# EAGLE board M139X (EAGLE 6.6.0)
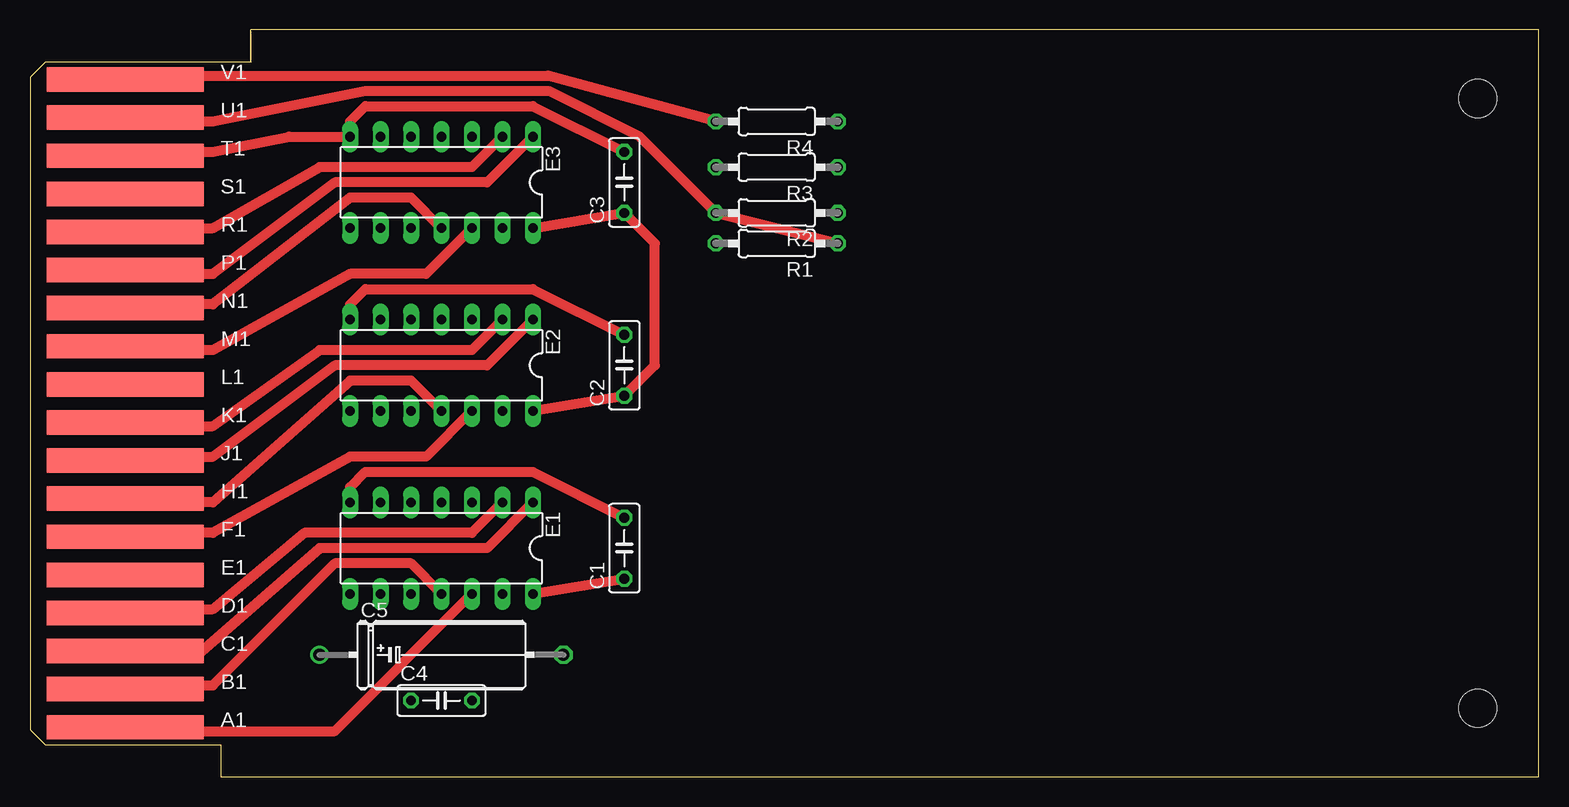
[diagram p0: board, top side]
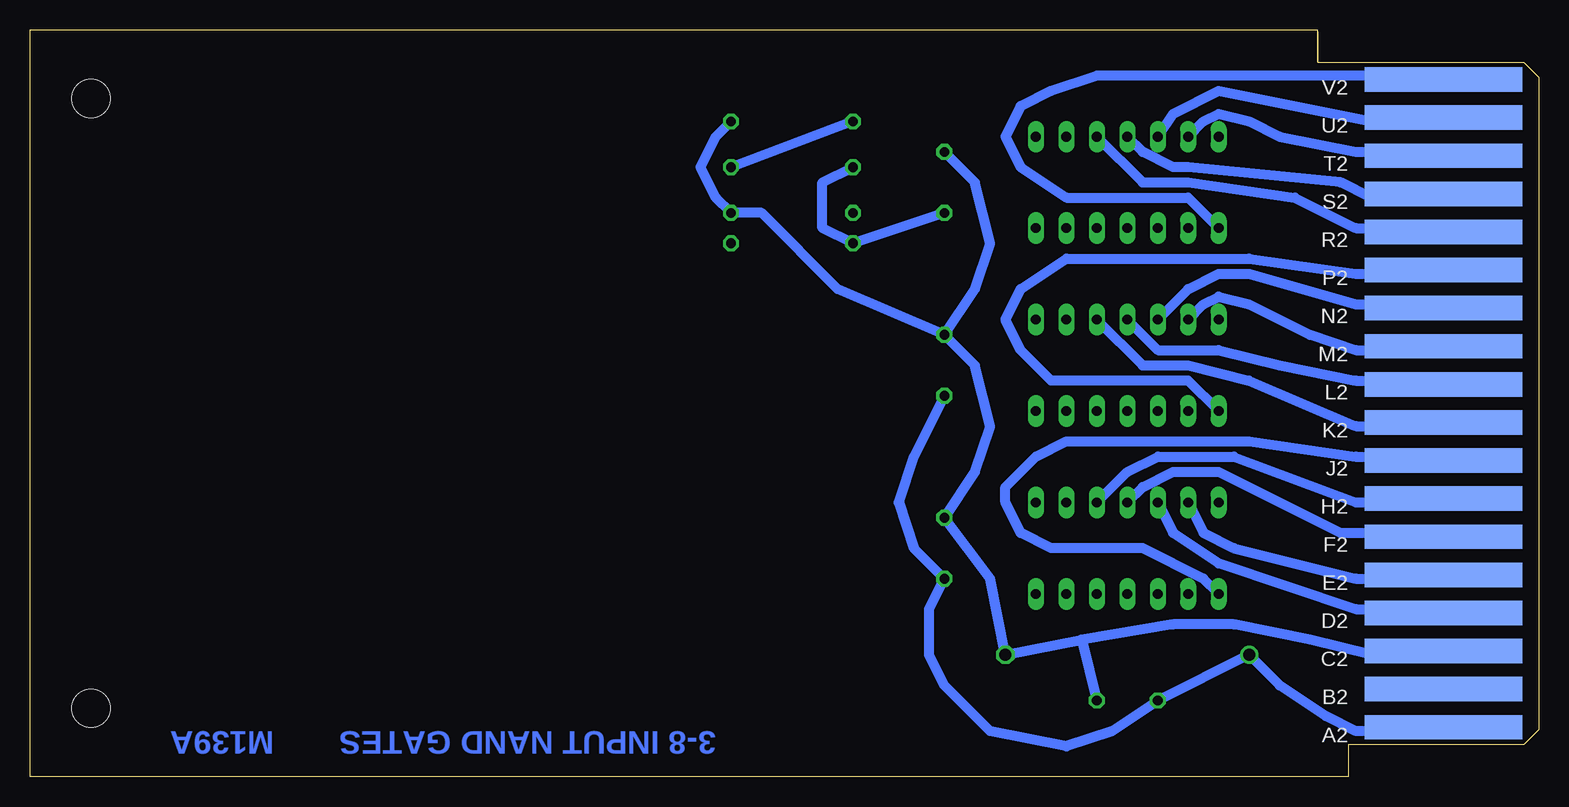
[diagram p1: board, bottom side, seen from below]

Size 125.73 x 62.23 mm. Coordinates in mm from the lower left corner, seen from the top.
Copper layers (1+16): Top 0.035mm / dielectric 1.5mm / Bottom 0.035mm
Design rules "16mils": minimum track width 16mil, minimum drill 32mil, track to track 15mil, track to pad 10mil, pad to pad 10mil, via to via 10mil, smd to smd 10mil, copper to edge 13mil, drill to drill 10mil, minimum pad ring 10mil, minimum via ring 8mil, stop-mask expansion 0mil, vias tented up to drill 0mil, thermal gap 10mil
Net classes: 0 default: width 0.813 mm

## Footprints (pad centres in the part's own frame; a part is rotated, then mirrored left to right if it is on the bottom)
C050-025X075 = drill 0.813 octagon: 1 -2.54,0; 2 2.54,0
E12-8 = drill 1.016: + -10.16,0 | drill 1.016 octagon: - 10.16,0
DIL14 = drill 0.813 long: 1 -7.62,-3.81; 2 -5.08,-3.81; 3 -2.54,-3.81; 4 0,-3.81; 5 2.54,-3.81; 6 5.08,-3.81; 7 7.62,-3.81; 8 7.62,3.81; 9 5.08,3.81; 10 2.54,3.81; 11 0,3.81; 12 -2.54,3.81; 13 -5.08,3.81; 14 -7.62,3.81
0207/10 = drill 0.813 octagon: 1 -5.08,0; 2 5.08,0
SINGLE = hole 3.175: 120.65,56.515; 120.65,5.715
EDGE-CON2 = smd 13.106 x 2.032: A1 7.938,4.128; B1 7.938,7.303; C1 7.938,10.477; D1 7.938,13.652; E1 7.938,16.828; F1 7.938,20.003; H1 7.938,23.177; J1 7.938,26.352; K1 7.938,29.527; L1 7.938,32.703; M1 7.938,35.877; N1 7.938,39.053; P1 7.938,42.227; R1 7.938,45.403; S1 7.938,48.578; T1 7.938,51.752; U1 7.938,54.928; V1 7.938,58.102 | smd 13.106 x 2.032 bottom: A2 7.938,4.128; B2 7.938,7.303; C2 7.938,10.477; D2 7.938,13.652; E2 7.938,16.828; F2 7.938,20.003; H2 7.938,23.177; J2 7.938,26.352; K2 7.938,29.527; L2 7.938,32.703; M2 7.938,35.877; N2 7.938,39.053; P2 7.938,42.227; R2 7.938,45.403; S2 7.938,48.578; T2 7.938,51.752; U2 7.938,54.928; V2 7.938,58.102

## Placement (x,y rotation side)
C1  .01uF  [C050-025X075]  49.53,19.05 90 top
C2  .01uF  [C050-025X075]  49.53,34.29 90 top
C3  .01uF  [C050-025X075]  49.53,49.53 90 top
C4  .01uF  [C050-025X075]  34.29,6.35 0 top
C5  6.8uF  [E12-8]  34.29,10.16 0 top
E1  74H30N  [DIL14]  34.29,19.05 180 top
E2  74H30N  [DIL14]  34.29,34.29 180 top
E3  74H30N  [DIL14]  34.29,49.53 180 top
R1  330  [0207/10]  62.23,44.45 180 top
R2  750  [0207/10]  62.23,46.99 180 top
R3  330  [0207/10]  62.23,50.8 180 top
R4  750  [0207/10]  62.23,54.61 180 top
U$1  OUTLINE-SINGLE  [SINGLE]  0,0 0 top
U$2  [EDGE-CON2]  0,0 0 top

## Library data of the parts
C1-C4 R1-R4 = rcl
C5 E1-E3 U$1 U$2 = dec-con

## Nets
GND: C1.2 C2.2 C3.2 C4.2 C5.- E1.7 E2.7 E3.7 R2.1 R4.1 U$2.C2 U$2.T1
N$1: E1.1 U$2.C1
N$2: E1.2 U$2.D1
N$3: E1.3 U$2.H2
N$4: E1.4 U$2.F2
N$5: E1.6 U$2.E2
N$6: E1.5 U$2.D2
N$7: E1.11 U$2.B1
N$8: E1.12 U$2.A1
N$9: E1.8 U$2.J2
N$10: E2.1 U$2.J1
N$11: E2.2 U$2.K1
N$12: E2.3 U$2.K2
N$13: E2.4 U$2.L2
N$14: E2.5 U$2.N2
N$15: E2.6 U$2.M2
N$16: E2.8 U$2.P2
N$17: E2.11 U$2.H1
N$18: E2.12 U$2.F1
N$19: E3.8 U$2.V2
N$20: E3.1 U$2.P1
N$21: E3.2 U$2.R1
N$22: E3.3 U$2.R2
N$23: E3.4 U$2.S2
N$24: E3.5 U$2.U2
N$25: E3.6 U$2.T2
N$26: E3.12 U$2.M1
N$27: E3.11 U$2.N1
N$30: R1.1 R2.2 U$2.U1
N$31: R3.1 R4.2 U$2.V1
VCC: C1.1 C2.1 C3.1 C4.1 C5.+ E1.14 E2.14 E3.14 R1.2 R3.2 U$2.A2

## Tracks (layer width: path | path; a pad name or v marks a point on that pad's centre or on a via)
GND
  Top 0.813: U$2.T1 10.16,52.07 15.24,52.07 21.59,53.34 E3.7 26.67,54.61 27.94,55.88 41.91,55.88 C3.2 | E1.7 26.67,24.13 27.94,25.4 41.91,25.4 C1.2 | E2.7 26.67,39.37 27.94,40.64 41.91,40.64 C2.2
  Bottom 0.813: 38.1,11.43 C5.- 45.72,16.51 C1.2 46.99,25.4 45.72,29.21 46.99,34.29 C2.2 | 38.1,11.43 C4.2 | U$2.C2 10.16,10.16 13.97,10.16 19.05,11.43 25.4,12.7 30.48,12.7 38.1,11.43 | C2.2 46.99,40.64 45.72,44.45 46.99,49.53 C3.2 | R4.1 68.58,53.34 69.85,50.8 68.58,48.26 R2.1 64.77,46.99 58.42,40.64 C2.2
N$1
  Top 0.813: E1.1 38.1,19.05 24.13,19.05 13.97,10.16 8.89,10.16 U$2.C1
N$2
  Top 0.813: E1.2 36.83,20.32 22.86,20.32 15.24,13.97 8.89,13.97 U$2.D1
N$3
  Bottom 0.813: E1.3 34.29,25.4 31.75,26.67 25.4,26.67 15.24,22.86 8.89,22.86 U$2.H2
N$4
  Bottom 0.813: E1.4 33.02,24.13 30.48,25.4 26.67,25.4 16.51,20.32 8.89,20.32 U$2.F2
N$5
  Bottom 0.813: E1.6 27.94,20.32 25.4,19.05 15.24,16.51 8.89,16.51 U$2.E2
N$6
  Bottom 0.813: E1.5 30.48,20.32 26.67,17.78 15.24,13.97 8.89,13.97 U$2.D2
N$7
  Top 0.813: E1.11 31.75,17.78 25.4,17.78 15.24,7.62 8.89,7.62 U$2.B1
N$8
  Top 0.813: U$2.A1 8.89,3.81 25.4,3.81 E1.12
N$9
  Bottom 0.813: E1.8 27.94,16.51 33.02,19.05 40.64,19.05 43.18,20.32 44.45,22.86 44.45,24.13 41.91,26.67 39.37,27.94 24.13,27.94 15.24,26.67 8.89,26.67 U$2.J2
N$10
  Top 0.813: E2.1 38.1,34.29 25.4,34.29 15.24,26.67 8.89,26.67 U$2.J1
N$11
  Top 0.813: E2.2 36.83,35.56 24.13,35.56 15.24,29.21 8.89,29.21 U$2.K1
N$12
  Bottom 0.813: E2.3 33.02,34.29 29.21,34.29 24.13,33.02 15.24,29.21 8.89,29.21 U$2.K2
N$13
  Bottom 0.813: E2.4 31.75,35.56 26.67,35.56 21.59,34.29 15.24,33.02 8.89,33.02 U$2.L2
N$14
  Bottom 0.813: E2.5 29.21,40.64 26.67,41.91 24.13,41.91 15.24,39.37 8.89,39.37 U$2.N2
N$15
  Bottom 0.813: E2.6 27.94,39.37 26.67,40.01 24.13,39.37 19.05,36.83 15.24,35.56 8.89,35.56 U$2.M2
N$16
  Bottom 0.813: E2.8 29.21,33.02 40.64,33.02 43.18,35.56 44.45,38.1 43.18,40.64 39.37,43.18 24.13,43.18 15.24,41.91 8.89,41.91 U$2.P2
N$17
  Top 0.813: E2.11 31.75,33.02 26.67,33.02 15.24,22.86 8.89,22.86 U$2.H1
N$18
  Top 0.813: E2.12 33.02,26.67 26.67,26.67 15.24,20.32 8.89,20.32 U$2.F1
N$19
  Bottom 0.813: U$2.V2 8.89,58.42 36.83,58.42 40.64,57.15 43.18,55.88 44.45,53.34 43.18,50.8 39.37,48.26 29.21,48.26 E3.8
N$20
  Top 0.813: E3.1 38.1,49.53 25.4,49.53 15.24,41.91 8.89,41.91 U$2.P1
N$21
  Top 0.813: E3.2 36.83,50.8 24.13,50.8 15.24,45.72 8.89,45.72 U$2.R1
N$22
  Bottom 0.813: E3.3 33.02,49.53 29.21,49.53 20.32,48.26 15.24,45.72 8.89,45.72 U$2.R2
N$23
  Bottom 0.813: U$2.S2 8.89,48.26 13.97,48.26 16.51,49.53 29.21,50.8 30.48,50.8 33.02,52.07 E3.4
N$24
  Bottom 0.813: E3.5 30.48,55.24 26.67,57.15 13.97,54.61 8.89,54.61 U$2.U2
N$25
  Bottom 0.813: E3.6 27.94,54.61 26.67,55.24 24.13,54.61 21.59,53.34 15.24,52.07 8.89,52.07 U$2.T2
N$26
  Top 0.813: E3.12 33.02,41.91 26.67,41.91 15.24,35.56 8.89,35.56 U$2.M1
N$27
  Top 0.813: E3.11 31.75,48.26 26.67,48.26 15.24,39.37 8.89,39.37 U$2.N1
N$30
  Top 0.813: R1.1 R2.2 50.8,53.34 43.18,57.15 27.94,57.15 15.24,54.61 10.16,54.61 U$2.U1
N$31
  Top 0.813: U$2.V1 10.16,58.42 43.18,58.42 R4.2
  Bottom 0.813: R4.2 R3.1
VCC
  Top 0.813: E3.14 C3.1 52.07,44.45 52.07,34.29 C2.1 E2.14 | E1.14 C1.1
  Bottom 0.813: U$2.A2 9.84,4.13 10.16,3.81 15.24,3.81 17.78,5.08 21.59,7.62 C5.+ C4.1 35.56,3.81 39.37,2.54 45.72,3.81 49.53,7.62 50.8,10.16 50.8,13.97 C1.1 52.07,19.05 53.34,22.86 52.07,26.67 C2.1 | C3.1 R1.2 59.69,45.72 59.69,49.53 R3.2

## Text on the board
Bottom: 3-8 INPUT NAND GATES | M139A